# EAGLE board tag (EAGLE 7.6.0)
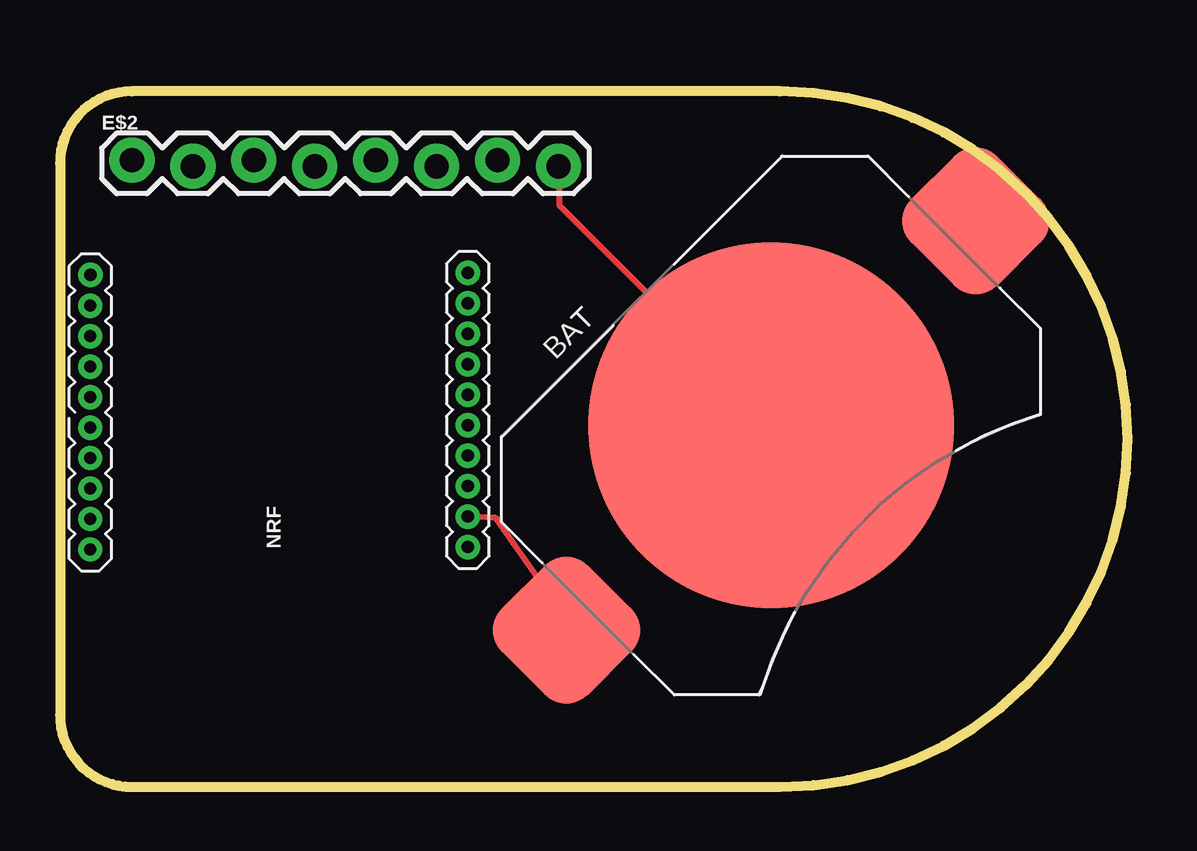
[diagram p0: board, top side]
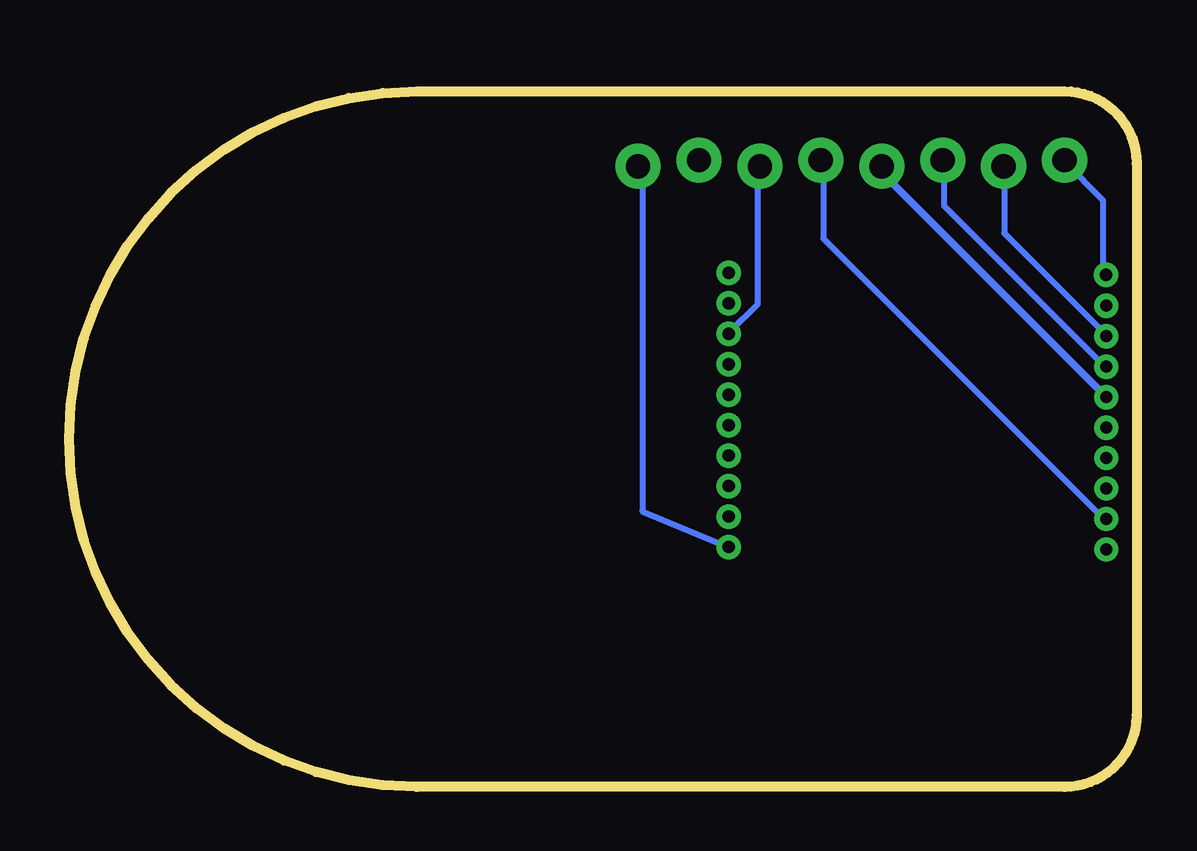
[diagram p1: board, bottom side, seen from below]

Size 44.5 x 29 mm. Coordinates in mm from the lower left corner, seen from the top.
Outline: 3,0 30,0 arc180 30,29 3,29 arc90 0,26 0,3 arc90 3,0
Copper layers (1*16): Top 0.035mm / dielectric 1.5mm / Bottom 0.035mm
Design rules "default": minimum track width 10mil, minimum drill 24mil, track to track 8mil, track to pad 8mil, pad to pad 8mil, via to via 8mil, smd to smd 8mil, copper to edge 40mil, drill to drill 8mil, minimum pad ring 10mil, minimum via ring 8mil, stop-mask expansion 4mil, vias tented up to drill 0mil, thermal gap 10mil

## Footprints (pad centres in the part's own frame; a part is rotated, then mirrored left to right if it is on the bottom)
BAT2P-SMD-20.32-CR2032 = smd 5.08 x 5.08: V1 -12.065,0; V2 12.065,0 | smd 15.24 x 15.24: V- 0,0
1X08_LOCK = drill 1.016 pad 1.88: 1 0,0.127; 2 2.54,-0.127; 3 5.08,0.127; 4 7.62,-0.127; 5 10.16,0.127; 6 12.7,-0.127; 7 15.24,0.127; 8 17.78,-0.127
1X11-1.27MM = drill 0.508 pad 1: 1 0,0; 2 1.27,0; 3 2.54,0; 4 3.81,0; 5 5.08,0; 6 6.35,0; 7 7.62,0; 8 8.89,0; 9 10.16,0; 10 11.43,0; 11 11.35,15.73; 12 5.08,0; 13 4.98,15.74; 14 6.25,15.74; 15 3.71,15.74; 16 7.52,15.74; 17 2.44,15.74; 18 8.79,15.74; 19 1.17,15.74; 20 10.06,15.74; 21 -0.1,15.74; 23 4.98,15.74

## Placement (x,y rotation side)
BAT  [BAT2P-SMD-20.32-CR2032]  29.64,15.07 45 top
E$2  [1X08_LOCK]  3,26 0 top
NRF  [1X11-1.27MM]  17,10 90 top

## Library data of the parts
BAT = Seeed-OPL-Connector
E$2 NRF = SparkFun-Connectors-10-1.27

## Nets
S$1: BAT.V- E$2.8 NRF.1
S$2: BAT.V1 NRF.2
S$3: E$2.4 NRF.14
S$5: E$2.3 NRF.16
S$8: E$2.6 NRF.8
S$12: E$2.5 NRF.19
S$14: E$2.2 NRF.18
S$15: E$2.1 NRF.11

## Tracks (layer width: path | path; a pad name or v marks a point on that pad's centre or on a via)
S$1
  Top 0.254: E$2.8 20.83,25.83 20.83,24.23 30.89,14.17 BAT.V-
  Bottom 0.254: NRF.1 17.17,10.06 20.6,11.49 20.6,25.83 E$2.8
S$2
  Top 0.254: NRF.2 18.17,11.2 18.2,11.17 22.2,5.49 BAT.V1
S$3
  Bottom 0.305: E$2.4 10.62,25.61 NRF.14
S$5
  Bottom 0.254: NRF.16 1.4,17.6 8.03,24.23 8.03,26.06 E$2.3
S$8
  Bottom 0.254: NRF.8 16.95,18.97 15.8,20.12 15.8,25.83 E$2.6
S$12
  Bottom 0.254: NRF.19 1.4,11.2 13.06,22.86 13.06,26.06 E$2.5
S$14
  Bottom 0.254: NRF.18 1.4,18.97 5.52,23.09 5.52,25.83 E$2.2
S$15
  Bottom 0.254: NRF.11 1.4,21.49 1.4,24.46 3,26.06 E$2.1